# Altium PCB DQLA-F.PcbDoc
Units mil, origin at the board's own origin, x right, y up, seen from the top; angles counter-clockwise.
Board outline 4600.02 x 2750 mil, 4 copper layers (Top Layer, Plane 1, Signal 1, Bottom Layer), stack 62 mil thick; 55 components, 113 nets, 307 pads, 172 vias.
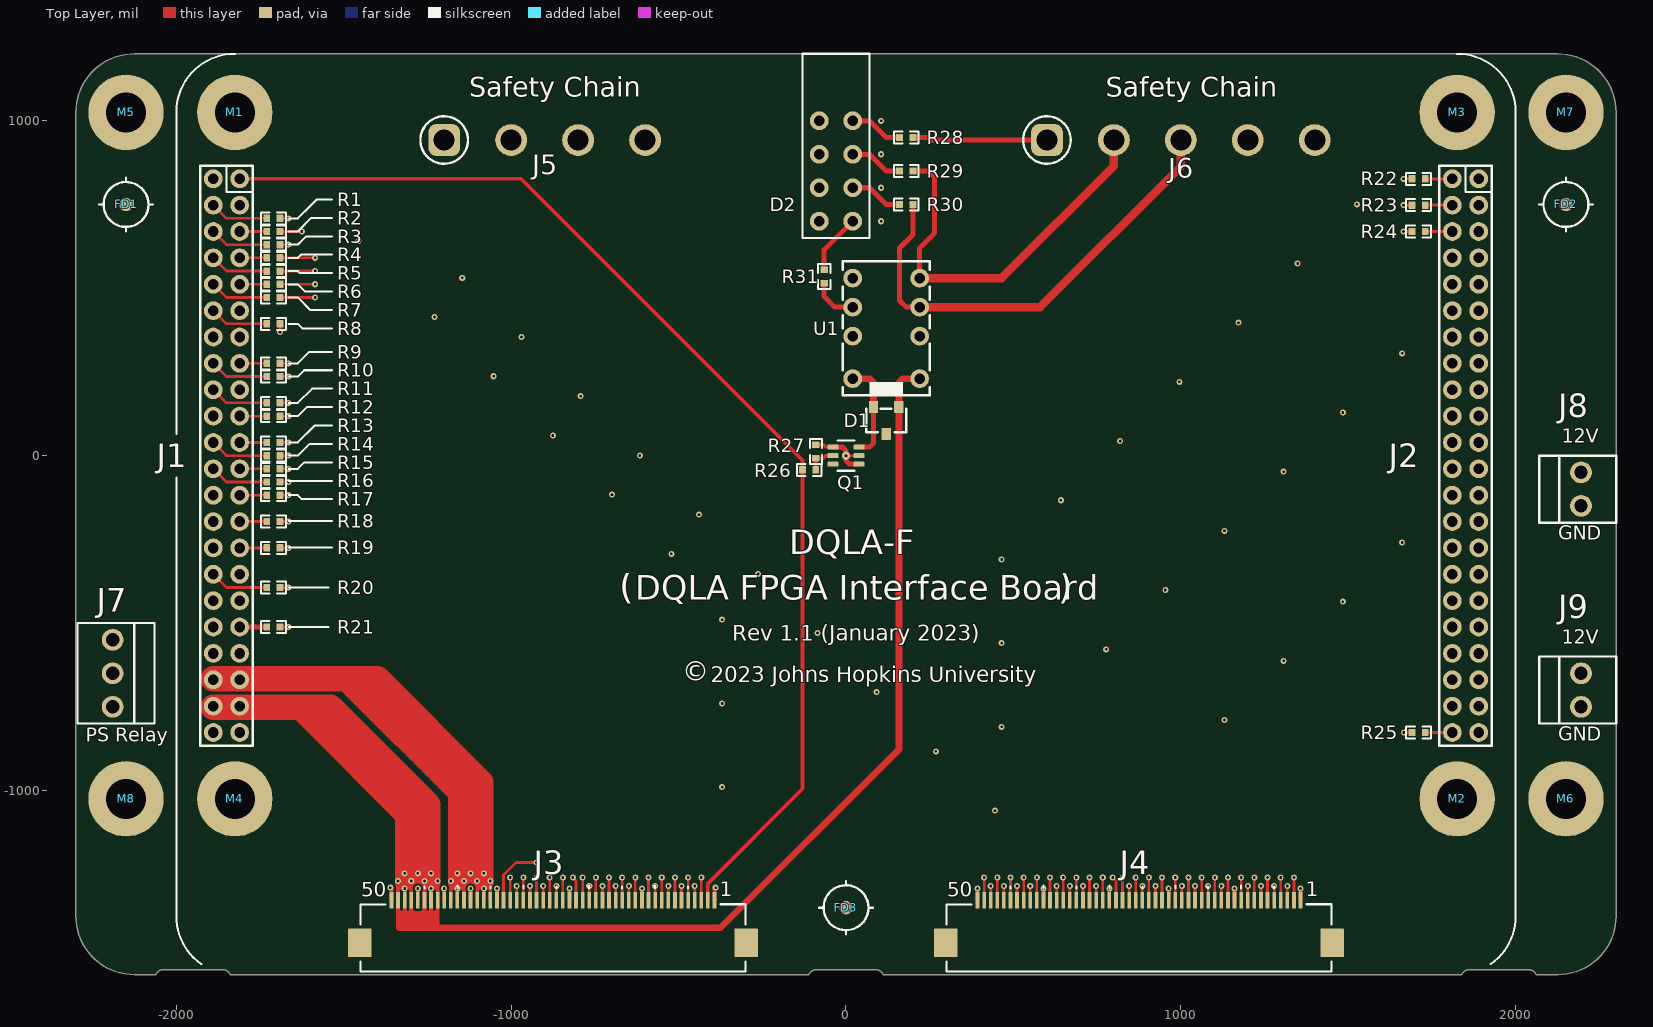
[diagram p0: Top Layer view]
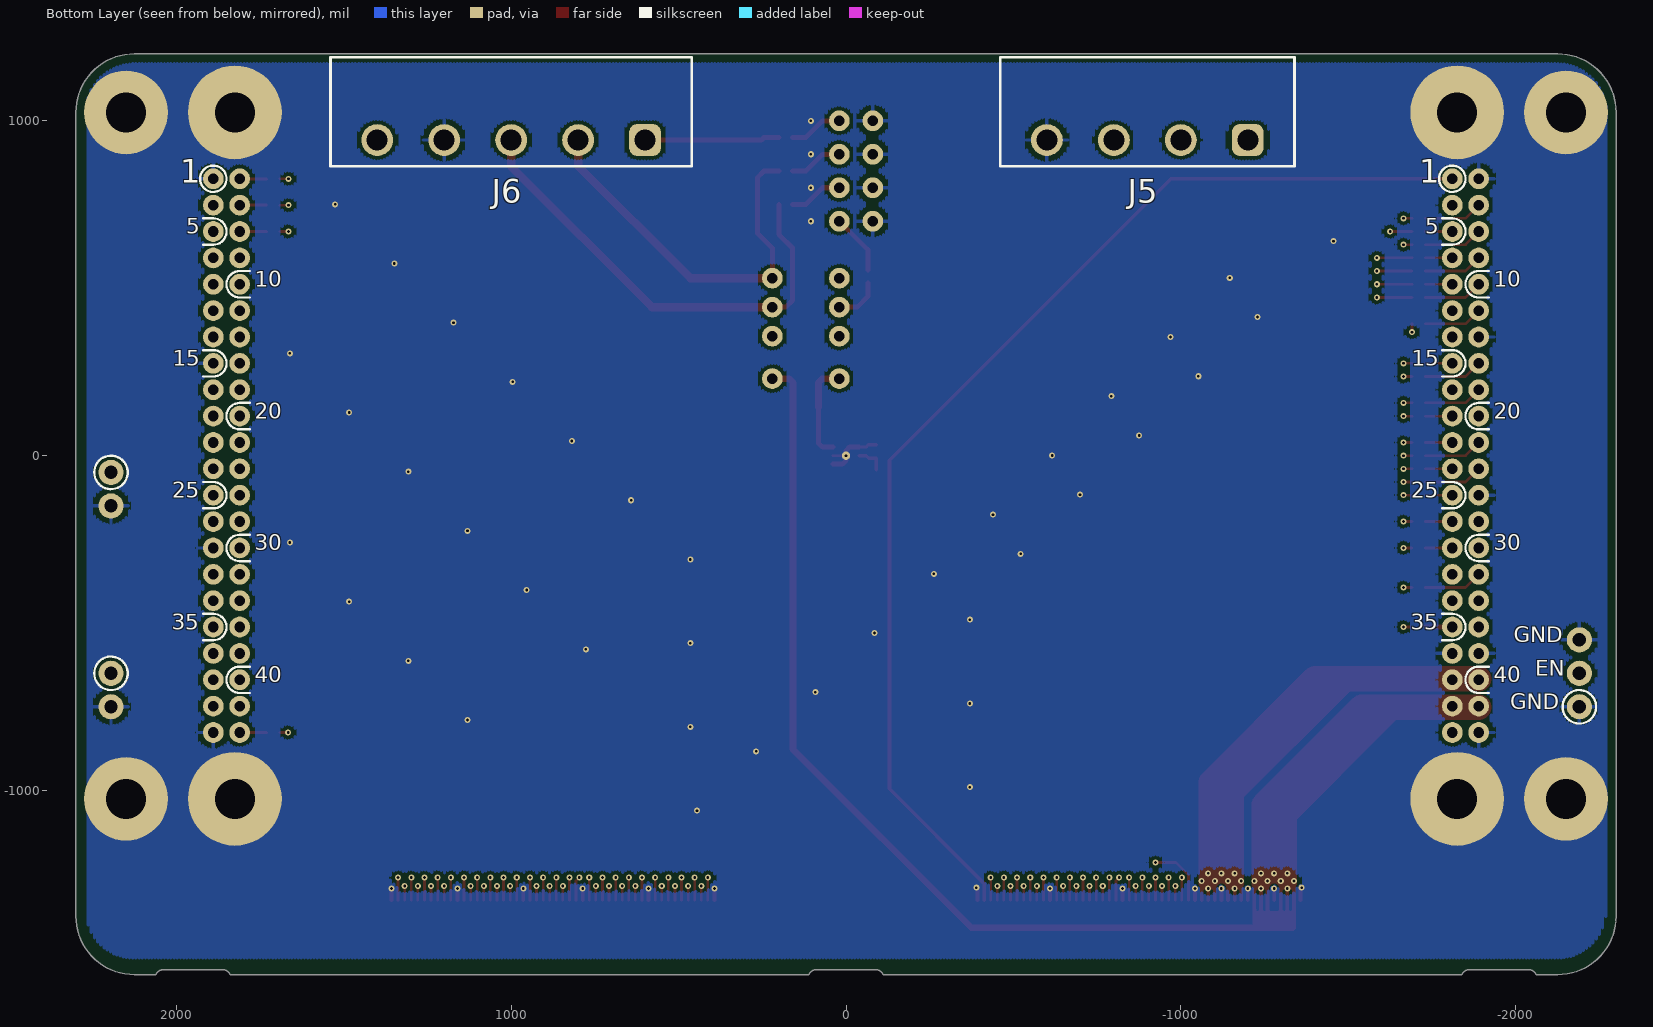
[diagram p1: Bottom Layer view, seen from below]
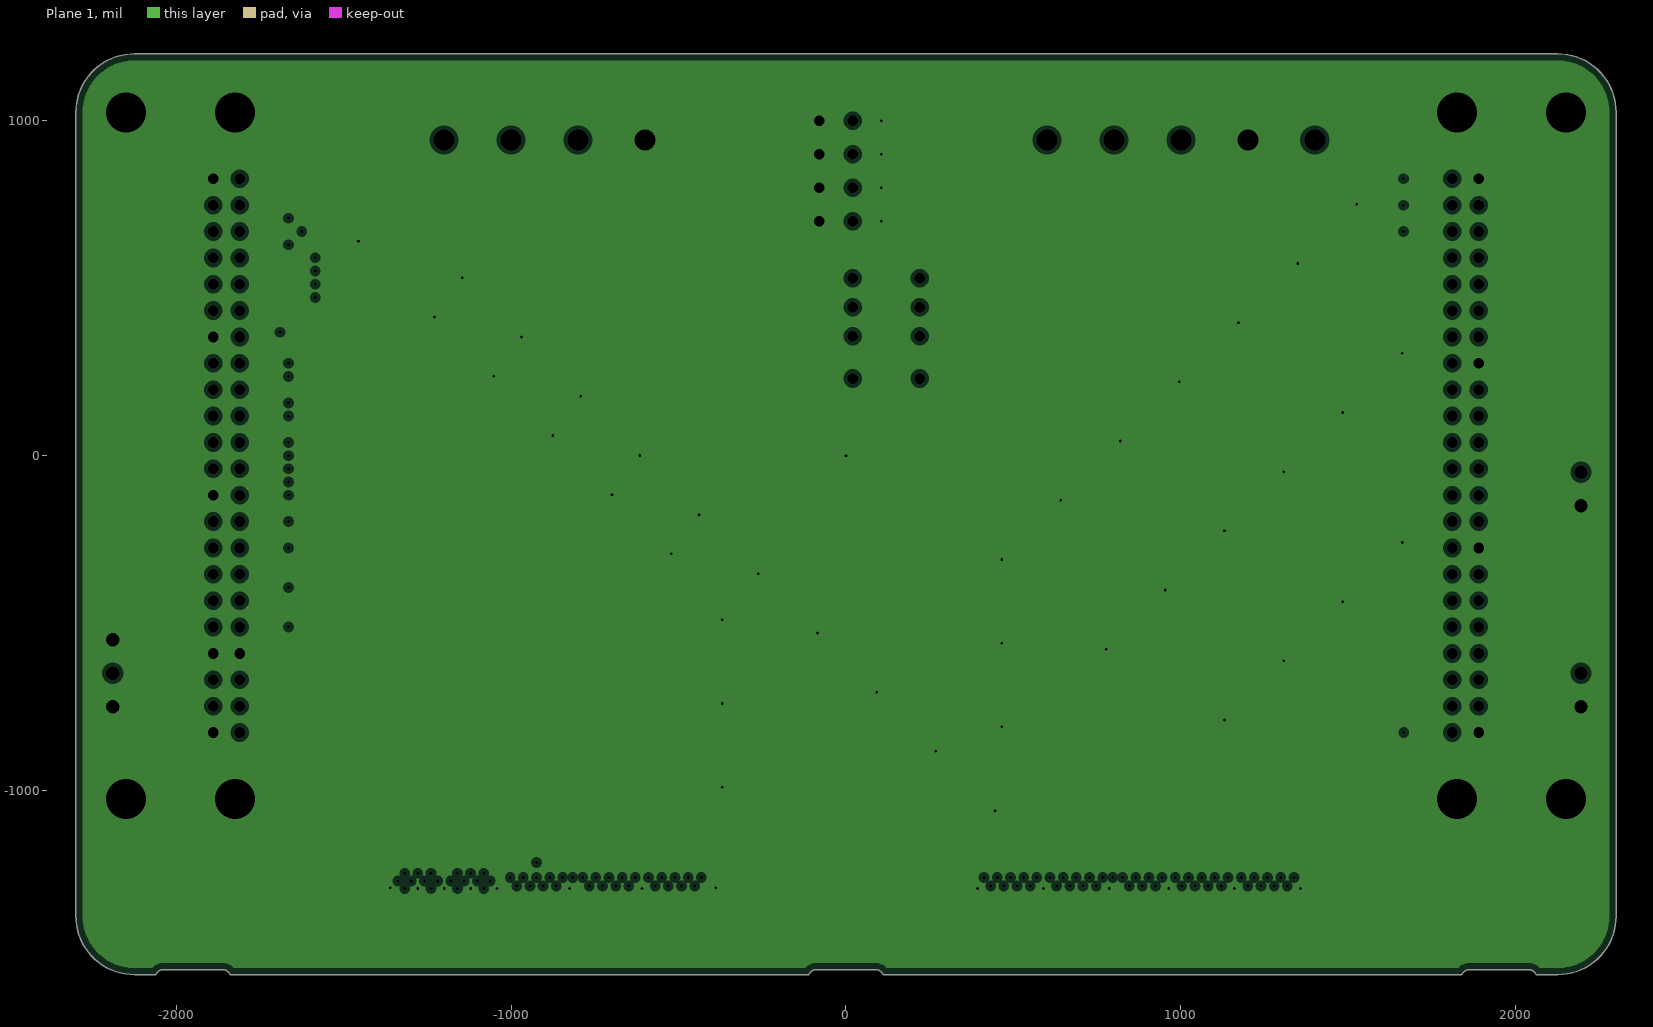
[diagram p2: Plane 1, clearances drawn from the general rule]
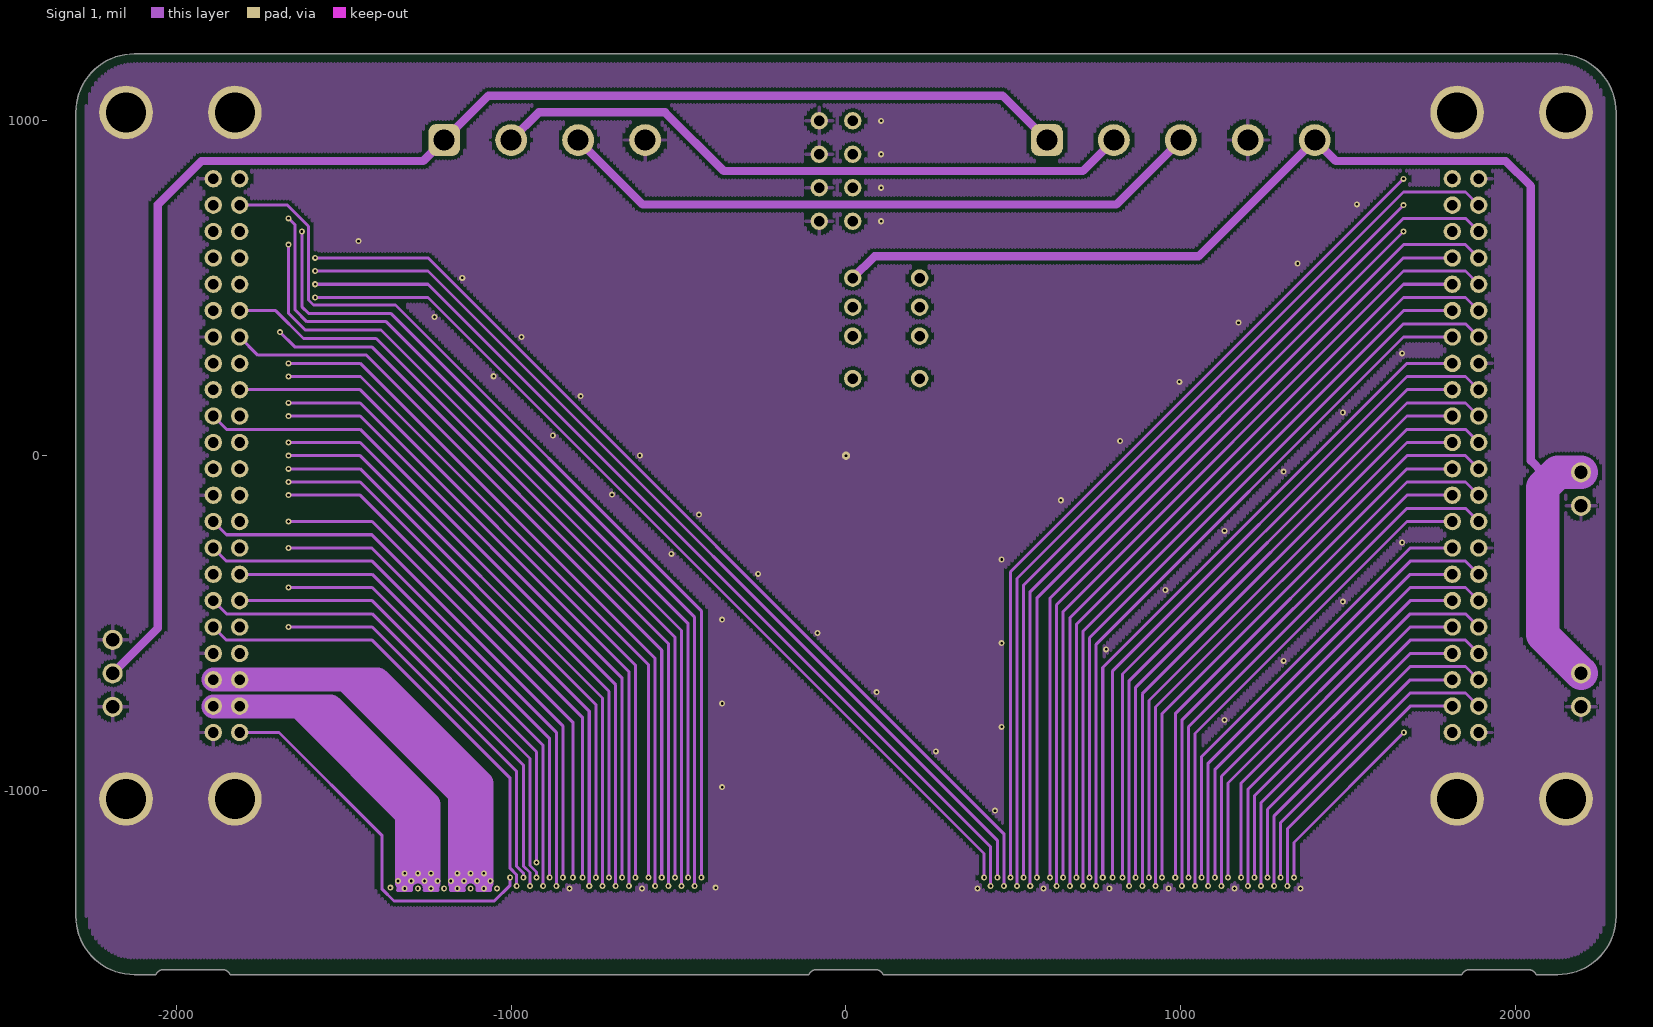
[diagram p3: Signal 1]
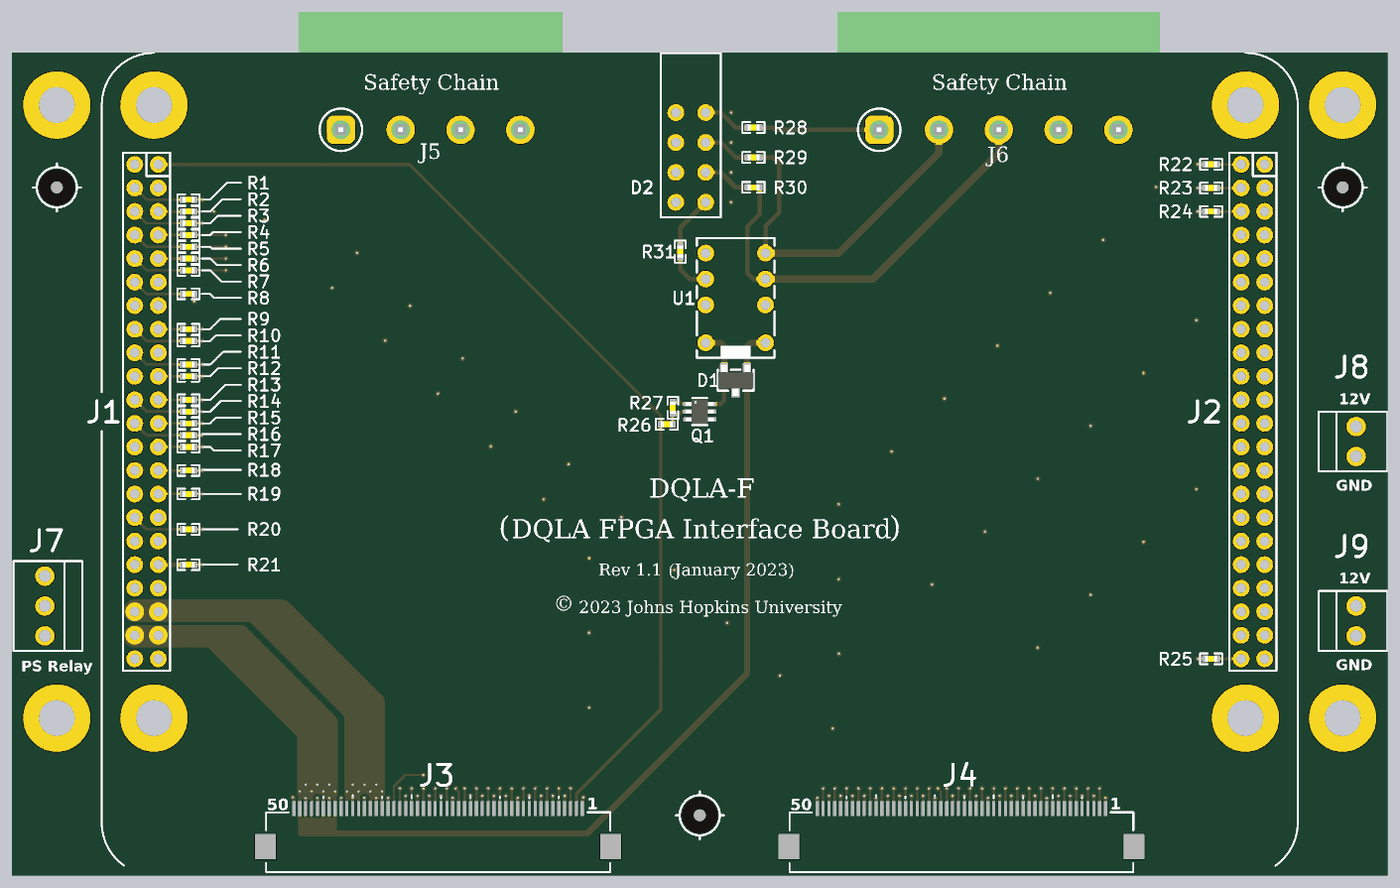
[diagram p4: 3D render of the assembled board from above, using the file's embedded part models]

## Layer stack, top to bottom
Top Solder: solder mask 0.4, Solder Resist, Dk 3.5
Top Layer: signal copper 1.9
Prepreg1: prepreg 8.2, PP-022, Dk 4.5
Plane 1: plane copper 1.4, net GND
Core1: core 39, Core-042, Dk 4.6
Signal 1: signal copper 1.4
Prepreg2: prepreg 8.2, PP-022, Dk 4.5
Bottom Layer: signal copper 1.9
Bottom Solder: solder mask 0.4, Solder Resist, Dk 3.5

## Board outline
-2125,-1550 -2060.91,-1550 cw(c-2038,-1560) -2038,-1535 -1862,-1535 cw(c-1862,-1560) -1839.09,-1550 -110.91,-1550 cw(c-88,-1560) -88,-1535 88,-1535 cw(c88,-1560) 110.92,-1550 1839.08,-1550 cw(c1862,-1560) 1862,-1535 2038,-1535 cw(c2038,-1560) 2060.91,-1550 2125,-1550 ccw(c2125,-1375) 2300,-1375 2300.02,-1375 2300,1025 ccw(c2125,1025) 2125,1200 -2125,1200 ccw(c-2125,1025) -2300,1025 -2300,-1375 ccw(c-2125,-1375)

## Design rules (kind name [scope] priority, off if disabled: settings)
Clearance ClearancePoly [InPoly] p1: gap=10 ignorepadtopadclearanceinfootprint=FALSE
Clearance [All] p2: gap=6 ignorepadtopadclearanceinfootprint=FALSE
ComponentClearance [All] p1 off: gap=10 collisioncheckmode=3 verticalgap=10 showdistances=FALSE
HoleSize [All] p1: absolutevalues=TRUE maxlimit=250 minlimit=8 maxpercent=80.000 minpercent=20.000
MinimumSolderMaskSliver [All] p1: minsoldermaskwidth=6
PlaneClearance [All] p1: clearance=12
PlaneConnect PlaneConnectRelief [(AsMils(Hole)>20) And (AsMils(Hole)<80)] p1: planeconnectstyle=Relief reliefexpansion=20 reliefentries=4 reliefconductorwidth=10 reliefairgap=10
PlaneConnect [All] p2: planeconnectstyle=Direct reliefexpansion=20 reliefentries=4 reliefconductorwidth=10 reliefairgap=10
PolygonConnect [(AsMils(Hole)>20) And (AsMils(Hole)<80)] p1: connectstyle=Relief reliefconductorwidth=10 reliefentries=4 polygonreliefangle="90 Angle" airgapwidth=15
PolygonConnect PolygonConnectDirect [All] p2: connectstyle=Direct reliefconductorwidth=10 reliefentries=4 polygonreliefangle="90 Angle" airgapwidth=10
RoutingVias [All] p1: holewidth=8 width=18 viastyle="Through Hole" minholewidth=8 minwidth=18 maxholewidth=8 maxwidth=18
SilkToSilkClearance [All] p1: silktosilkclearance=2
SilkToSolderMaskClearance [IsPad] p1: minsilkscreentomaskgap=3 clearancetoexposedcopper=TRUE
SolderMaskExpansion [All] p1: expansion=3 istentingtop=FALSE
Width [All] p1: maxlimit=100 minlimit=6 preferedwidth=9 toplayer_prefwidth=8 midlayer1_minwidth=9 bottomlayer_prefwidth=8 minimp=50.000000 maximp=50.000000 favimp=50.000000
23 further rules are at their usual default settings.

## Components (designator, comment, footprint, x,y, rotation, side; value= is the part's Value field where it differs from the comment)
D1 "AZ23C6V8" SOT-23 120,105 r180 top
D2 "WP914CK/4GDT" LED-3MM-QUAD -30,1000 r0 top
FD1 "FD" FD -2150,750 r0 top
FD2 "FD" FD 2150,750 r0 top
FD3 "FD" FD 0,-1350 r0 top
J1 "HEADER 22x2-1" HDR-22x2-2MM -1850,0 r270 top locked
J2 "HEADER 22x2-1" HDR-22x2-2MM 1850,0 r270 top locked
J3 "FPC 50" CONN-XF3M1-5015-1B-REV -875,-1500 r0 top
J4 "FPC 50" CONN-XF3M1-5015-1B-REV 875,-1500 r0 top
J5 "691313510004" 691313510004 -900,1100 r0 bottom (schematic designator J6)
J6 "691313510005" 691313510005 1000,1100 r0 bottom (schematic designator J7)
J7 "HEADER 3" HDR-3x1-100 -2190,-650 r90 top (schematic designator J8)
J8 "HEADER 2" HDR-2x1-100 2195,-100 r270 top (schematic designator J9)
J9 "HEADER 2" HDR-2x1-100 2195,-700 r270 top (schematic designator J5)
M1 "MHOLE" MHOLE4#1 -1825,1025 r0 top
M2 "MHOLE" MHOLE4#1 1825,-1025 r0 top
M3 "MHOLE" MHOLE4#1 1825,1025 r0 top
M4 "MHOLE" MHOLE4#1 -1825,-1025 r0 top
M5 "MHOLE" MHOLE4#2 -2150,1025 r0 top
M6 "MHOLE" MHOLE4#2 2150,-1025 r0 top
M7 "MHOLE" MHOLE4#2 2150,1025 r0 top
M8 "MHOLE" MHOLE4#2 -2150,-1025 r0 top
Q1 "SQ1912" SC70-6-NP 0,0 r270 top
R1 "49.9" R0402 -1710,708.66 r0 top
R2 "49.9" R0402 -1710,669.29 r0 top
R3 "49.9" R0402 -1710,629.92 r0 top
R4 "49.9" R0402 -1710,590.55 r0 top
R5 "49.9" R0402 -1710,551.18 r0 top
R6 "49.9" R0402 -1710,511.81 r0 top
R7 "49.9" R0402 -1710,472.44 r0 top
R8 "49.9" R0402 -1710,393.7 r0 top
R9 "49.9" R0402 -1710,275.59 r0 top
R10 "49.9" R0402 -1710,236.22 r0 top
R11 "49.9" R0402 -1710,157.48 r0 top
R12 "49.9" R0402 -1710,118.11 r0 top
R13 "49.9" R0402 -1710,39.37 r0 top
R14 "49.9" R0402 -1710,0 r0 top
R15 "49.9" R0402 -1710,-39.37 r0 top
R16 "49.9" R0402 -1710,-78.74 r0 top
R17 "49.9" R0402 -1710,-118.11 r0 top
R18 "49.9" R0402 -1710,-196.85 r0 top
R19 "49.9" R0402 -1710,-275.59 r0 top
R20 "49.9" R0402 -1710,-393.7 r0 top
R21 "49.9" R0402 -1710,-511.81 r0 top
R22 "49.9" R0402 1710,826.77 r0 top
R23 "49.9" R0402 1710,748.03 r0 top
R24 "49.9" R0402 1710,669.29 r0 top
R25 "49.9" R0402 1710,-826.77 r0 top
R26 "49.9" R0402 -110,-42.5 r0 top
R27 "1.00K" R0402 -90,12.5 r90 top
R28 "4.99K" R0402 180,950 r180 top
R29 "4.99K" R0402 180,850 r180 top
R30 "4.99K" R0402 180,750 r180 top
R31 "4.99K" R0402 -65,535 r90 top
U1 "RELAY DPDT" RELAY-IM03TS 120,380 r90 top

## Footprints (in the part's own frame and the unit in brackets; to place one, negate y for a bottom-side part, rotate by r counter-clockwise, add the part's x,y. Pads: shape width x height; smd on the part's side, far side on the other; paste and mask are expansions set on the pad)
691313510004 [mil] "5,08mm - PCB Headers - Horizontal - Closed ends - 04p"
  rrect50% 95x95 hole 63: 1(-300,157.48)
  round 95 hole 63: 2(-100,157.48) 3(100,157.48) 4(300,157.48)
  silkscreen extent -439,-90 439,236, body extent -439,-236 439,236, height 337
691313510005 [mil] "5,08mm - PCB Headers - Horizontal - Closed ends - 05p"
  rrect50% 95x95 hole 63: 1(-400,157.48)
  round 95 hole 63: 2(-200,157.48) 3(0,157.48) 4(200,157.48) 5(400,157.48)
  silkscreen extent -539,-90 539,236, body extent -539,-236 539,236, height 337
CONN-XF3M1-5015-1B-REV [mil] "Omron: CONN-XF3M-5015-1B"
  rrect15% 11x50 smd mask+0.5: 1(482.28,172.5) 2(462.6,172.5) 3(442.91,172.5) 4(423.23,172.5) 5(403.54,172.5) 6(383.86,172.5) 7(364.17,172.5) 8(344.49,172.5) 9(324.8,172.5) 10(305.12,172.5) 11(285.43,172.5) 12(265.75,172.5) 13(246.06,172.5) 14(226.38,172.5) 15(206.69,172.5) 16(187.01,172.5) 17(167.32,172.5) 18(147.64,172.5) 19(127.95,172.5) 20(108.27,172.5) 21(88.58,172.5) 22(68.9,172.5) 23(49.21,172.5) 24(29.53,172.5) 25(9.84,172.5) 26(-9.84,172.5) 27(-29.53,172.5) 28(-49.21,172.5) 29(-68.9,172.5) 30(-88.58,172.5) 31(-108.27,172.5) 32(-127.95,172.5) 33(-147.64,172.5) 34(-167.32,172.5) 35(-187.01,172.5) 36(-206.69,172.5) 37(-226.38,172.5) 38(-246.06,172.5) 39(-265.75,172.5) 40(-285.43,172.5) 41(-305.12,172.5) 42(-324.8,172.5) 43(-344.49,172.5) 44(-364.17,172.5) 45(-383.86,172.5) 46(-403.54,172.5) 47(-423.23,172.5) 48(-442.91,172.5) 49(-462.6,172.5) 50(-482.28,172.5)
  rrect5% 70x85 smd: 51(-576.86,45) 52(576.86,45)
  silkscreen extent -575,-40 575,217
FD [mil]
  round 40 smd paste+0: 0(0,0)
  silkscreen extent -80,-80 80,80
HDR-2x1-100 [mil] "AMP 0.100"
  round 65 / inner round 60 / far side round 75 hole 40: 1(-50,0) 2(50,0)
  silkscreen extent -100,-125 100,105
HDR-3x1-100 [mil] "AMP 0.100"
  round 65 / inner round 60 / far side round 75 hole 40: 1(-100,0) 2(0,0) 3(100,0)
  silkscreen extent -150,-125 150,105
HDR-22x2-2MM [mil]
  round 56 / inner round 52 / far side round 62 hole 32: 1(-826.77,39.37) 2(-826.77,-39.37) 3(-748.03,39.37) 4(-748.03,-39.37) 5(-669.29,39.37) 6(-669.29,-39.37) 7(-590.55,39.37) 8(-590.55,-39.37) 9(-511.81,39.37) 10(-511.81,-39.37) 11(-433.07,39.37) 12(-433.07,-39.37) 13(-354.33,39.37) 14(-354.33,-39.37) 15(-275.59,39.37) 16(-275.59,-39.37) 17(-196.85,39.37) 18(-196.85,-39.37) 19(-118.11,39.37) 20(-118.11,-39.37) 21(-39.37,39.37) 22(-39.37,-39.37) 23(39.37,39.37) 24(39.37,-39.37) 25(118.11,39.37) 26(118.11,-39.37) 27(196.85,39.37) 28(196.85,-39.37) 29(275.59,39.37) 30(275.59,-39.37) 31(354.33,39.37) 32(354.33,-39.37) 33(433.07,39.37) 34(433.07,-39.37) 35(511.81,39.37) 36(511.81,-39.37) 37(590.55,39.37) 38(590.55,-39.37) 39(669.29,39.37) 40(669.29,-39.37) 41(748.03,39.37) 42(748.03,-39.37) 43(826.77,39.37) 44(826.77,-39.37)
  silkscreen extent -866,-79 866,79
LED-3MM-QUAD [mil]
  round 56 / inner round 52 / far side round 62 hole 32 mask+2: 1(-50,0) 2(50,0) 3(-50,-100) 4(50,-100) 5(-50,-200) 6(50,-200) 7(-50,-300) 8(50,-300)
  silkscreen extent -100,-350 100,200
MHOLE4#1 [mil]
  round 225 / inner round 160 / far side round 280 hole 120: 1(0,0)
MHOLE4#2 [mil]
  round 225 / inner round 160 / far side round 250 hole 120: 1(0,0)
R0402 [mil]
  rrect15% 20x22 smd mask+2: 1(-20,0) 2(20,0)
  silkscreen extent -37,-18 37,18, body extent -20,-10 20,10, height 20
RELAY-IM03TS [mil]
  round 56 / inner round 52 / far side round 62 hole 32: 1(-150,-100) 2(-23.2,-100) 3(63.4,-100) 4(150,-100) 5(150,100) 6(63.4,100) 7(-23.2,100) 8(-150,100)
  silkscreen extent -200,-130 200,130
SC70-6-NP [mil] "SC70-6, SOT-363"
  rrect20% 15x32 smd mask+2: 1(-25.59,-39) 2(0,-39) 3(25.59,-39) 4(25.59,39) 5(0,39) 6(-25.59,39)
  silkscreen extent -45,-25 45,25, body extent -42,-47 42,47, height 43
SOT-23 [mil]
  rrect15% 28x36 smd mask+2: 1(-38,-40) 2(38,-40) 3(0,40)
  silkscreen extent -60,-35 60,35, body extent -60,-52 60,52, height 44

## Part data
D1: library part ZENER-DUAL-CC, Voltage=6.8V
D2: library part LED-QUAD
J5: "WR-TBL Series 313 Close Horizontal PCB Header, THT, pitch 5.08mm, 4p", Manufacturer="Wurth Elektronik", Operating Temperature Max=105°C, Operating Temperature Min=-40°C, Rated Current=20A, Working Voltage=300V, Application=Pluggable, Category="Terminal Blocks", ComponentLink1Description="Website Link", ComponentLink1URL=https://www.we-online.com/redexpert/article/691313510004?ad, ComponentLink2Description="Datasheet Link", ComponentLink2URL=https://www.we-online.com/redexpert/spec/691313510004?ad, Manufacturer Part Number=691313510004, Match Code=WR-TBL, Modularity=No, Mount="Through Hole", Number of Pins=4, Number of Rows=1, Orientation=Horizontal, Packaging=Box, Pitch=5.08mm
J6: "WR-TBL Series 313 Close Horizontal PCB Header, THT, pitch 5.08mm, 5p", Manufacturer="Wurth Elektronik", Operating Temperature Max=105°C, Operating Temperature Min=-40°C, Rated Current=20A, Working Voltage=300V, Application=Pluggable, Category="Terminal Blocks", ComponentLink1Description="Website Link", ComponentLink1URL=https://www.we-online.com/redexpert/article/691313510005?ad, ComponentLink2Description="Datasheet Link", ComponentLink2URL=https://www.we-online.com/redexpert/spec/691313510005?ad, Manufacturer Part Number=691313510005, Match Code=WR-TBL, Modularity=No, Mount="Through Hole", Number of Pins=5, Number of Rows=1, Orientation=Horizontal, Packaging=Box, Pitch=5.08mm
M1 M2 M3 M4 M5 M6 M7 M8: "Mounting Hole"
Q1: library part MOSFET-N-DUAL6
R1 R2 R3 R4 R5 R6 R7 R8 R9 R10 R11 R12 R13 R14 R15 R16 R17 R18 R19 R20 R21 R22 R23 R24 R25 R26 R28 R29 R30 R31: library part R
R27: library part R-GND

## Free pads (board coordinates)
  round 25 hole 8 mask+3: 2(0,0)

## Via types
v1: diameter 18, hole 8, Top Layer to Bottom Layer, tented both sides, 172 vias

## Nets (pads, with @x,y where several pads share a name; then routed paths per layer and width w, separated by ;. In a path a pad name is that pad's centre, name@x,y a point inside that pad or via, vN(x,y) a via of type N, cw(c..) or ccw(c..) an arc to the next point about the centre after c; other vN are vias at no path point)
3.3V-OUT: J1.39 J1.40 J3.35 J3.36 J3.37 J3.39 J3.40 J3.41 | length 3670
  Top Layer w11: -1183.62,-1244 -1183.62,-1279.92 cw(c-1199.8,-1292.5) -1180.12,-1298.22 J3.41 ; -1180.12,-1300 cw(c-1170.28,-1300) v1@-1160.43,-1299.91 ; J3.40 v1@-1160.43,-1299.91 ; v1(-1160.43,-1292.5) v1@-1160.43,-1299.91 ; J3.39 -1140.75,-1299.92 ; -1140.75,-1300 ccw(c-1150.59,-1300) -1140.75,-1299.92 ; -1140.75,-1286.78 -1140.75,-1244 ; J3.37 -1101.38,-1298.22 ccw(c-1121.06,-1292.5) -1140.75,-1298.22 -1140.75,-1299.92 ; -1101.38,-1300 cw(c-1091.54,-1300) v1@-1081.69,-1299.91 ; -1101.38,-1286.78 v1(-1101.38,-1270) -1101.38,-1244 ; J3.36 v1@-1081.69,-1299.91 ; v1(-1081.69,-1292.5) v1@-1081.69,-1299.91 ; J3.35 -1062.01,-1299.88 ; -1062.01,-1300 ccw(c-1071.85,-1300) -1062.01,-1299.88 ; -1058.51,-1244 -1058.51,-1279.92 ccw(c-1042.32,-1292.5) -1062.01,-1298.22 -1062.01,-1299.88 ; v1@-1160.43,-1299.91 ccw(c-1150.59,-1300) -1160.43,-1300 ccw(c-1170.28,-1300) v1@-1160.43,-1299.91 ; v1@-1160.43,-1299.91 cw(c-1150.59,-1300) -1140.75,-1299.92 ; v1@-1081.69,-1299.91 cw(c-1071.85,-1300) -1062.01,-1299.88 ; v1@-1081.69,-1299.91 ccw(c-1071.85,-1300) -1081.69,-1300 ccw(c-1091.54,-1300) v1@-1081.69,-1299.91
  Top Layer w76: J1.40@-1889.37,-666.29 -1399.37,-666.29 -1091.14,-974.52 ; -1489.37,-666.29 -1135.82,-1019.84
  Signal 1 w11: -1183.62,-1258.9 -1183.62,-1279.92 cw(c-1199.8,-1292.5) -1180.12,-1298.22 -1140.75,-1298.22 cw(c-1121.06,-1292.5) -1101.38,-1298.22 -1062.01,-1298.22 cw(c-1042.32,-1292.5) -1058.51,-1279.92 -1058.51,-1258.9
  Signal 1 w72: J1.40@-1889.37,-668.29 -1399.37,-668.29
  Signal 1 w76: -1489.37,-670.29 -1135.82,-1023.84 ; -1399.37,-670.29 -1091.28,-978.38
  other v1: -1180.12,-1270 -1140.75,-1270 -1062.01,-1270 -1160.43,-1247.5 -1121.06,-1247.5 -1081.69,-1247.5
5V-OUT: D1.1 J1.41 J1.42 J3.43 J3.44 J3.45 J3.47 J3.48 J3.49 U1.1 | length 6758.1
  Top Layer w11: -1341.1,-1244 -1341.1,-1279.92 -1335.44,-1285.57 ; -1337.6,-1410 J3.49 -1337.6,-1282.5 ; -1337.6,-1355 ccw(c-1327.76,-1355) -1317.91,-1355.09 ; -1337.6,-1300 cw(c-1327.76,-1300) v1@-1317.91,-1299.91 ; v1(-1317.91,-1292.5) v1@-1317.91,-1299.91 ; -1298.23,-1410 J3.47 -1298.23,-1299.92 ; -1298.23,-1355.08 cw(c-1308.07,-1355) -1317.91,-1355.09 ; -1298.23,-1355 ccw(c-1288.39,-1355) -1288.39,-1364.84 ; -1298.23,-1300 ccw(c-1308.07,-1300) -1298.23,-1299.92 ; -1298.23,-1244 -1298.23,-1286.77 ; -1268.7,-1364.84 ccw(c-1268.7,-1355) -1258.86,-1355 ccw(c-1249.02,-1355) -1239.17,-1355.09 ; -1258.86,-1410 J3.45 -1258.86,-1298.22 ccw(c-1278.54,-1292.5) -1258.86,-1286.78 ; -1258.86,-1300 cw(c-1249.02,-1300) v1@-1239.17,-1299.91 ; -1258.86,-1244 v1(-1258.86,-1270) -1258.86,-1286.78 ; v1(-1239.17,-1292.5) v1@-1239.17,-1299.91 ; -1219.49,-1410 J3.43 -1219.49,-1299.88 ; -1219.49,-1355.08 cw(c-1229.33,-1355) -1239.17,-1355.09 ; -1219.49,-1300 ccw(c-1229.33,-1300) -1219.49,-1299.88 ; -1215.99,-1244 -1215.99,-1279.92 ccw(c-1199.8,-1292.5) -1219.49,-1298.22 -1219.49,-1299.88 ; -1317.91,-1355.09 J3.48 v1@-1317.91,-1299.91 ; v1@-1317.91,-1299.91 cw(c-1308.07,-1300) -1298.23,-1299.92 ; v1@-1317.91,-1299.91 ccw(c-1308.07,-1300) -1317.91,-1300 ccw(c-1327.76,-1300) v1@-1317.91,-1299.91 ; -1298.23,-1299.92 -1298.23,-1298.22 cw(c-1278.54,-1292.5) -1298.23,-1286.77 ; -1298.23,-1286.77 cw(c-1278.54,-1292.5) -1258.86,-1286.78 ; -1239.17,-1355.09 J3.44 v1@-1239.17,-1299.91 ; v1@-1239.17,-1299.91 cw(c-1229.33,-1300) -1219.49,-1299.88 ; v1@-1239.17,-1299.91 ccw(c-1229.33,-1300) -1239.17,-1300 ccw(c-1249.02,-1300) v1@-1239.17,-1299.91
  Top Layer w20: -1333.1,-1410 -375,-1410 158,-877 D1.1 158,218 170,230 U1.1
  Top Layer w76: J1.42@-1889.37,-751.03 -1629.37,-751.03 ; -1275.82,-1104.58 -1629.37,-751.03 ; -1248.61,-1041.79 -1539.37,-751.03 -1629.37,-751.03
  Signal 1 w11: -1341.1,-1258.9 -1341.1,-1279.92 cw(c-1357.28,-1292.5) -1337.6,-1298.22 -1298.23,-1298.22 cw(c-1278.54,-1292.5) -1258.86,-1298.22 -1219.49,-1298.22 cw(c-1199.8,-1292.5) -1215.99,-1279.92 -1215.99,-1258.9
  Signal 1 w72: J1.42@-1889.37,-749.03 -1629.37,-749.03
  Signal 1 w76: -1275.82,-1104.58 -1629.37,-751.03 -1539.37,-751.03 -1248.75,-1041.65
  other v1: -1337.6,-1270 -1298.23,-1270 -1219.49,-1270 -1317.91,-1247.5 -1278.54,-1247.5 -1239.17,-1247.5
12V: J6.5 J8.1 J9.1 U1.5 | length 3903.6
  Signal 1 w25: U1.5 85,595 1052.48,595 J6.5 1462.52,880 1970,880 2045,805 2045,-15 2080,-50 2080,-95
  Signal 1 w100: J9.1 2080,-535 2080,-95 2125,-50 J8.1
/Q1-DAC: J1.28 J3.24 | length 1817.3
  Top Layer w8: J3.24 v1(-845.47,-1260)
  Signal 1 w9: J1.28 -1850,-236.22 -1415.94,-236.22 -845.47,-806.69 v1(-845.47,-1260)
/Q1-EEPROM: J3.33 R20.2 | length 1488.5
  Top Layer w8: R20.2 v1(-1665,-393.7) ; J3.33 -1022.64,-1252.64 -985,-1215 v1(-924.21,-1215)
  Signal 1 w9: v1(-1665,-393.7) -1415,-393.7 -924.21,-884.49 v1(-924.21,-1215)
/Q1-EXP-CS: J3.8 R8.2 | length 2336.2
  Top Layer w8: v1(-1690,368.7) R8.2 ; J3.8 v1(-530.51,-1285)
  Signal 1 w9: v1(-1690,368.7) -1646.3,325 -1416.3,325 -530.51,-560.79 v1(-530.51,-1285)
/Q1-IOEXP: J3.30 R21.2 | length 1277.7
  Top Layer w8: R21.2 v1(-1665,-511.81) ; J3.30 v1(-963.58,-1260)
  Signal 1 w9: v1(-1665,-511.81) -1415,-511.81 -983.27,-943.54 -983.27,-1226.73 -963.58,-1246.42 v1(-963.58,-1260)
/Q2-DAC: J1.11 J3.7 | length 2489.2
  Top Layer w8: J3.7 v1(-510.83,-1260)
  Signal 1 w9: J1.11 -1703.07,433.07 -1620,350 -1402.87,350 -510.83,-542.05 v1(-510.83,-1260)
/Q2-EEPROM: J3.6 R3.2 | length 2601.3
  Top Layer w8: R3.2 v1(-1665,629.92) ; J3.6 v1(-491.14,-1285)
  Signal 1 w9: v1(-1665,629.92) -1665,425 -1615,375 -1388.5,375 -491.14,-522.36 v1(-491.14,-1285)
/Q2-EXP-CS: J3.10 R9.2 | length 2207.1
  Top Layer w8: R9.2 v1(-1665,275.59) ; J3.10 v1(-569.88,-1285)
  Signal 1 w9: v1(-1665,275.59) -1450.94,275.59 -569.88,-605.47 v1(-569.88,-1285)
/Q2-IOEXP: J3.14 R11.2 | length 2056.4
  Top Layer w8: R11.2 v1(-1665,157.48) ; J3.14 v1(-648.62,-1285)
  Signal 1 w9: v1(-1665,157.48) -1450.94,157.48 -648.62,-644.84 v1(-648.62,-1285)
CONV-CUR: J3.22 R18.2 | length 1657.9
  Top Layer w8: R18.2 v1(-1665,-196.85) ; v1(-815.94,-1260) -806.1,-1269.84 J3.22
  Signal 1 w9: v1(-1665,-196.85) -1415,-196.85 -815.94,-795.91 v1(-815.94,-1260)
CONV-POT: J3.20 R16.2 | length 1771.2
  Top Layer w8: R16.2 v1(-1665,-78.74) ; J3.20 v1(-766.73,-1285)
  Signal 1 w9: v1(-1665,-78.74) -1450.94,-78.74 -766.73,-762.95 v1(-766.73,-1285)
EN: J5.1 J6.1 J7.2 R28.1 | length 4703.5
  Top Layer w15: R28.1 245,950 252.48,942.52 J6.1
  Signal 1 w25: J7.2 -2055,-515 -2055,750 -1925,880 -1262.52,880 J5.1 -1067.52,1075 467.52,1075 J6.1
EXP-MISO: J1.17 J3.13 | length 2224.5
  Top Layer w8: J3.13 v1(-628.94,-1260)
  Signal 1 w9: J1.17 -1450.94,196.85 -628.94,-625.16 v1(-628.94,-1260)
GND: D2.1 D2.3 D2.5 D2.7 J1.2 J1.14 J1.26 J1.37 J1.38 J1.44 J2.1 J2.15 J2.29 J2.43 J3.1 J3.12 J3.23 J3.34 J3.38 J3.42 J3.46 J3.50 J4.1 J4.11 J4.21 J4.30 J4.40 J4.50 J5.4 J6.4 J7.1 J7.3 J8.2 J9.2 M1.1 M2.1 M3.1 M4.1 M5.1 M6.1 M7.1 M8.1 pad.2 Q1.1 Q1.4 Q1.5 R27.2 | length 720.6
  Top Layer w8: pad.2 Q1.5
  Top Layer w10: R27.2 -66.91,32.5 -60,25.59 Q1.1
  Top Layer w11: v1@-1363.26,-1292.48 v1@-1357.6,-1298.13 ; J3.50 v1@-1357.28,-1290 ; J3.46 v1(-1278.54,-1292.5) ; J3.42 v1(-1199.8,-1292.5) ; J3.38 v1(-1121.06,-1292.5) ; J3.34 v1(-1042.32,-1292.5) ; J3.23 v1(-825.79,-1292.5) ; J3.12 v1(-609.25,-1292.5) ; J3.1 v1@-392.72,-1290 ; v1@-392.4,-1298.13 v1@-386.74,-1292.48 ; J4.50 v1(392.72,-1292.5) ; J4.40 v1(589.57,-1292.5) ; J4.30 v1(786.42,-1292.5) ; J4.21 v1(963.58,-1292.5) ; J4.11 v1(1160.43,-1292.5) ; J4.1 v1(1357.28,-1292.5)
  Top Layer w15: Q1.1 -10.59,25.59 0,15 pad.2 0,-15 10.59,-25.59 Q1.4
  other v1: -1360.78,-1290 -389.22,-1290 445,-1060 -370,-990 268.22,-883.22 465,-810 1130.33,-789.67 -370,-740 91.45,-706.45 1307.11,-612.89 776.78,-578.22 465,-560 -85.33,-529.67 -370,-490 1483.88,-436.12 953.55,-401.45 -262.11,-352.89 465,-310 -521.78,-293.22 1660.66,-259.34 1130.33,-224.67 -438.88,-176.12 641.78,-133.22 -698.55,-116.45 1307.11,-47.89 -615.66,0.66 818.55,43.55 -875.33,60.33 1483.88,128.88 -792.44,177.44 995.33,220.33 -1052.11,237.11 1660.66,305.66 -969.21,354.21 1172.11,397.11 -1228.88,413.88 -1145.99,530.99 1348.88,573.88 -1455.66,640.66 105,700 1525.66,750.66 105,800 105,900 105,1000
L1A: J5.3 J6.3 R30.1 U1.3 | length 3363.8
  Top Layer w15: R30.1 200,660 160,620 160,463.4 180,443.4 U1.3
  Top Layer w25: U1.3 579.62,443.4 1000,863.78 J6.3
  Signal 1 w25: J5.3 -607.48,750 807.48,750 J6.3
L1B: J5.2 J6.2 R29.1 U1.4 | length 3133.2
  Top Layer w15: R29.1 245,850 265,830 265,665 220,620 U1.4
  Top Layer w25: U1.4 465,530 800,865 J6.2
  Signal 1 w25: J5.2 -917.52,1025 -540,1025 -365,850 707.48,850 J6.2
MISO1: J1.3 J3.3 | length 2873.4
  Top Layer w8: J3.3 v1(-432.09,-1260)
  Signal 1 w9: J1.3 -1668.03,748.03 -1605,685 -1605,464.86 -1593.08,452.94 -1592.94,452.94 -1590,450 -1345.39,450 -432.09,-463.31 v1(-432.09,-1260)
MOSI1: J3.5 R1.2 | length 2694.3
  Top Layer w8: R1.2 v1(-1665,708.66) ; J3.5 v1(-471.46,-1260)
  Signal 1 w9: v1(-1665,708.66) -1645,688.66 -1645,435 -1610,400 -1373.19,400 -471.46,-501.73 v1(-471.46,-1260)
NetD1_2: D1.2 Q1.6 U1.8 | length 295.7
  Top Layer w15: Q1.6 70.59,25.59 82,37 D1.2
  Top Layer w20: U1.8 70,230 82,218 D1.2
NetD2_2: D2.2 R28.2 | length 160.7
  Top Layer w15: D2.2 70,1000 120,950 R28.2
NetD2_4: D2.4 R29.2 | length 160.7
  Top Layer w15: D2.4 70,900 120,850 R29.2
NetD2_6: D2.6 R30.2 | length 160.7
  Top Layer w15: D2.6 70,800 120,750 R30.2
NetD2_8: D2.8 R31.2 | length 180.2
  Top Layer w15: R31.2 -65,615 D2.8
NetJ1_4: J1.4 R1.1 | length 175.7
  Top Layer w8: J1.4 -1850,708.66 R1.1
NetJ1_5: J1.5 R2.1 | length 80.6
  Top Layer w8: J1.5 R2.1
NetJ1_6: J1.6 R3.1 | length 175.7
  Top Layer w8: J1.6 -1850,629.92 R3.1
NetJ1_7: J1.7 R4.1 | length 80.6
  Top Layer w8: J1.7@-1810.63,590.55 R4.1
NetJ1_8: J1.8 R5.1 | length 175.7
  Top Layer w8: J1.8 -1850,551.18 R5.1
NetJ1_9: J1.9 R6.1 | length 80.6
  Top Layer w8: J1.9 R6.1
NetJ1_10: J1.10 R7.1 | length 175.7
  Top Layer w8: J1.10 -1850,472.44 R7.1
NetJ1_12: J1.12 R8.1 | length 175.7
  Top Layer w8: J1.12 -1850,393.7 R8.1
NetJ1_15: J1.15 R9.1 | length 80.6
  Top Layer w8: J1.15 R9.1
NetJ1_16: J1.16 R10.1 | length 175.7
  Top Layer w8: J1.16 -1850,236.22 R10.1
NetJ1_18: J1.18 R11.1 | length 175.7
  Top Layer w8: J1.18 -1850,157.48 R11.1
NetJ1_19: J1.19 R12.1 | length 80.6
  Top Layer w8: J1.19 R12.1
NetJ1_21: J1.21 R13.1 | length 80.6
  Top Layer w8: J1.21 R13.1
NetJ1_22: J1.22 R14.1 | length 175.7
  Top Layer w8: J1.22 -1850,0 R14.1
NetJ1_23: J1.23 R15.1 | length 80.6
  Top Layer w8: J1.23 R15.1
NetJ1_24: J1.24 R16.1 | length 175.7
  Top Layer w8: J1.24 -1850,-78.74 R16.1
NetJ1_25: J1.25 R17.1 | length 80.6
  Top Layer w8: J1.25 R17.1
NetJ1_27: J1.27 R18.1 | length 80.6
  Top Layer w8: J1.27@-1810.63,-196.85 R18.1
NetJ1_29: J1.29 R19.1 | length 80.6
  Top Layer w8: J1.29 R19.1
NetJ1_32: J1.32 R20.1 | length 175.7
  Top Layer w8: J1.32 -1850,-393.7 R20.1
NetJ1_35: J1.35 R21.1 | length 80.6
  Top Layer w15: J1.35 R21.1
NetJ2_2: J2.2 R22.2 | length 80.6
  Top Layer w9: R22.2 J2.2
NetJ2_4: J2.4 R23.2 | length 80.6
  Top Layer w9: R23.2 J2.4
NetJ2_6: J2.6 R24.2 | length 80.6
  Top Layer w9: R24.2 J2.6
NetJ2_44: J2.44 R25.2 | length 80.6
  Top Layer w9: R25.2 J2.44
NetQ1_2: Q1.2 R26.2 R27.1 | length 89.1
  Top Layer w10: R26.2 R27.1 -67.5,-7.5 -60,0 Q1.2
Q1-DIR12: J1.43 J3.32 | length 1219.8
  Top Layer w8: J3.32 v1(-1002.95,-1260)
  Signal 1 w9: J1.43 -1693.23,-826.77 -1385,-1135 -1385,-1295 -1350,-1330 -1050,-1330 -1002.95,-1282.95 v1(-1002.95,-1260)
Q1-DIR34: J1.36 J3.31 | length 1445.8
  Top Layer w8: J3.31 v1(-983.27,-1285)
  Signal 1 w9: J1.36 -1850,-551.18 -1415,-551.18 -1002.95,-963.23 -1002.95,-1232.42 -983.27,-1252.11 v1(-983.27,-1285)
Q1-ENC-A1: J2.25 J4.20 | length 1766
  Top Layer w8: J4.20 v1(983.27,-1260)
  Signal 1 w9: v1(983.27,-1260) 983.27,-770.47 1675,-78.74 1850,-78.74 J2.25
Q1-ENC-A2: J2.27 J4.18 | length 1670.9
  Top Layer w8: J4.18 v1(1022.64,-1260)
  Signal 1 w9: v1(1022.64,-1260) 1022.64,-809.84 1675,-157.48 1850,-157.48 J2.27@1889.37,-196.85
Q1-ENC-A3: J2.30 J4.16 | length 1435.6
  Top Layer w8: J4.16 v1(1062.01,-1260)
  Signal 1 w9: v1(1062.01,-1260) 1062.01,-898.58 1685,-275.59 J2.30
Q1-ENC-A4: J2.32 J4.14 | length 1340.5
  Top Layer w8: J4.14 v1(1101.38,-1260)
  Signal 1 w9: v1(1101.38,-1260) 1101.38,-937.95 1685,-354.33 J2.32
Q1-ENC-B1: J2.34 J4.12 | length 1245.5
  Top Layer w8: J4.12 v1(1140.75,-1260)
  Signal 1 w9: v1(1140.75,-1260) 1140.75,-977.32 1685,-433.07 J2.34
Q1-ENC-B2: J2.36 J4.9 | length 1142.3
  Top Layer w8: J4.9 v1(1199.8,-1285)
  Signal 1 w9: v1(1199.8,-1285) 1199.8,-997.01 1685,-511.81 J2.36
Q1-ENC-B3: J2.38 J4.7 | length 1047.2
  Top Layer w8: J4.7 v1(1239.17,-1285)
  Signal 1 w9: v1(1239.17,-1285) 1239.17,-1036.38 1685,-590.55 J2.38
Q1-ENC-B4: J2.40 J4.5 | length 952.2
  Top Layer w8: J4.5 v1(1278.54,-1285)
  Signal 1 w9: v1(1278.54,-1285) 1278.54,-1075.75 1685,-669.29 J2.40
Q1-EXP-MOSI: J3.15 R12.2 | length 2008.8
  Top Layer w8: R12.2 v1(-1665,118.11) ; J3.15 v1(-668.31,-1260)
  Signal 1 w9: v1(-1665,118.11) -1450.94,118.11 -668.31,-664.53 v1(-668.31,-1260)
Q1-EXP-SCLK: J3.17 R13.2 | length 1913.8
  Top Layer w8: R13.2 v1(-1665,39.37) ; J3.17 v1(-707.68,-1260)
  Signal 1 w9: v1(-1665,39.37) -1450.95,39.37 -707.68,-703.9 v1(-707.68,-1260)
Q1-LIM-P3: J2.17 J4.29 | length 2162.5
  Top Layer w8: v1(796.26,-1260) 806.1,-1269.84 J4.29
  Signal 1 w9: v1(796.26,-1260) 796.26,-642.52 1675,236.22 1850,236.22 J2.17
Q1-LIM-P4: J2.16 J4.31 | length 2114.9
  Top Layer w8: J4.31 v1(766.73,-1260)
  Signal 1 w9: v1(766.73,-1260) 766.73,-632.68 1675,275.59 J2.16
Q1-MISO-C1: J2.5 J4.42 | length 2738.6
  Top Layer w8: J4.42 v1(550.2,-1285)
  Signal 1 w9: v1(550.2,-1285) 550.2,-406.14 1665,708.66 1850,708.66 J2.5
Q1-MISO-C2: J2.3 J4.44 | length 2833.7
  Top Layer w8: J4.44 v1(510.83,-1285)
  Signal 1 w9: v1(510.83,-1285) 510.83,-366.77 1665,787.4 1850,787.4 J2.3
Q1-MISO-C3: J2.8 J4.38 | length 2492.8
  Top Layer w8: J4.38 v1(628.94,-1285)
  Signal 1 w9: v1(628.94,-1285) 628.94,-445.51 1665,590.55 J2.8
Q1-MISO-C4: J2.7 J4.39 | length 2635.4
  Top Layer w8: J4.39 v1(609.25,-1260)
  Signal 1 w9: v1(609.25,-1260) 609.25,-425.83 1665,629.92 1850,629.92 J2.7
Q1-MISO-P1: J1.31 J3.27 | length 1580.2
  Top Layer w8: J3.27 v1(-904.53,-1285)
  Signal 1 w9: J1.31 -1415,-354.33 -904.53,-864.8 v1(-904.53,-1285)
Q1-MISO-P2: J1.30 J3.26 | length 1722.8
  Top Layer w8: J3.26 v1(-884.84,-1260)
  Signal 1 w9: J1.30 -1850,-314.96 -1415,-314.96 -884.84,-845.12 v1(-884.84,-1260)
Q1-MISO-P3: J1.34 J3.29 | length 1540.9
  Top Layer w8: J3.29 v1(-943.9,-1285)
  Signal 1 w9: J1.34 -1850,-472.44 -1415,-472.44 -963.58,-923.86 -963.58,-1225.2 -943.9,-1244.89 v1(-943.9,-1285)
Q1-MISO-P4: J1.33 J3.28 | length 1493.3
  Top Layer w8: J3.28 v1(-924.21,-1260)
  Signal 1 w9: J1.33 -1415,-433.07 -943.9,-904.17 -943.9,-1223.68 -924.21,-1243.36 v1(-924.21,-1260)
Q1-MOSI: J3.25 R19.2 | length 1554.1
  Top Layer w8: R19.2 v1(-1665,-275.59) ; J3.25 v1(-865.16,-1285)
  Signal 1 w9: v1(-1665,-275.59) -1415.94,-275.59 -865.16,-826.38 v1(-865.16,-1285)
Q1-OUT1: J4.47 R5.2 | length 3024.7
  Top Layer w8: R5.2 v1(-1585,551.18) ; J4.47 v1(451.77,-1260)
  Signal 1 w9: v1(-1585,551.18) -1248.15,551.18 451.77,-1148.74 v1(451.77,-1260)
Q1-OUT2: J4.46 R4.2 | length 3072.2
  Top Layer w8: R4.2 v1(-1585,590.55) ; J4.46 v1(471.46,-1285)
  Signal 1 w9: v1(-1585,590.55) -1248.15,590.55 471.46,-1129.06 v1(471.46,-1285)
Q1-OUT3: J4.49 R7.2 | length 2929.6
  Top Layer w8: R7.2 v1(-1585,472.44) ; J4.49 v1(412.4,-1260)
  Signal 1 w9: v1(-1585,472.44) -1248.15,472.44 412.4,-1188.11 v1(412.4,-1260)
Q1-OUT4: J4.48 R6.2 | length 2977.1
  Top Layer w8: R6.2 v1(-1585,511.81) ; J4.48 v1(432.09,-1285)
  Signal 1 w9: v1(-1585,511.81) -1248.15,511.81 432.09,-1168.43 v1(432.09,-1285)
Q1-TEMP1: J2.9 J4.37 | length 2540.4
  Top Layer w8: J4.37 v1(648.62,-1260)
  Signal 1 w9: v1(648.62,-1260) 648.62,-465.2 1665,551.18 1850,551.18 J2.9
Q1-TEMP2: J2.10 J4.36 | length 2397.8
  Top Layer w8: J4.36 v1(668.31,-1285)
  Signal 1 w9: v1(668.31,-1285) 668.31,-484.88 1665,511.81 J2.10
Q2-DIR12: J1.20 J3.16 | length 2177
  Top Layer w8: J3.16 v1(-687.99,-1285)
  Signal 1 w9: J1.20 -1850,78.74 -1450.95,78.74 -687.99,-684.21 v1(-687.99,-1285)
Q2-DIR34: J1.13 J3.9 | length 2394.1
  Top Layer w8: J3.9 v1(-550.2,-1260)
  Signal 1 w9: J1.13 -1756.3,300 -1431.61,300 -550.2,-581.42 v1(-550.2,-1260)
Q2-ENC-A1: J2.28 J4.17 | length 1528.3
  Top Layer w8: J4.17 v1(1042.32,-1285)
  Signal 1 w9: v1(1042.32,-1285) 1042.32,-829.53 1675,-196.85 J2.28
Q2-ENC-A2: J2.31 J4.15 | length 1483.1
  Top Layer w8: J4.15 v1(1081.69,-1285)
  Signal 1 w9: v1(1081.69,-1285) 1081.69,-918.27 1685,-314.96 1850,-314.96 J2.31
Q2-ENC-A3: J2.33 J4.13 | length 1388.1
  Top Layer w8: J4.13 v1(1121.06,-1285)
  Signal 1 w9: v1(1121.06,-1285) 1121.06,-957.64 1685,-393.7 1850,-393.7 J2.33
Q2-ENC-A4: J2.35 J4.10 | length 1284.9
  Top Layer w8: J4.10 v1(1180.12,-1260)
  Signal 1 w9: v1(1180.12,-1260) 1180.12,-977.32 1685,-472.44 1850,-472.44 J2.35
Q2-ENC-B1: J2.37 J4.8 | length 1189.8
  Top Layer w8: J4.8 v1(1219.49,-1260)
  Signal 1 w9: v1(1219.49,-1260) 1219.49,-1016.69 1685,-551.18 1850,-551.18 J2.37
Q2-ENC-B2: J2.39 J4.6 | length 1094.8
  Top Layer w8: J4.6 v1(1258.86,-1260)
  Signal 1 w9: v1(1258.86,-1260) 1258.86,-1056.06 1685,-629.92 1850,-629.92 J2.39
Q2-ENC-B3: J2.41 J4.4 | length 999.7
  Top Layer w8: J4.4 v1(1298.23,-1260)
  Signal 1 w9: v1(1298.23,-1260) 1298.23,-1095.43 1685,-708.66 1850,-708.66 J2.41
Q2-ENC-B4: J2.42 J4.3 | length 857.2
  Top Layer w8: J4.3 v1(1317.91,-1285)
  Signal 1 w9: v1(1317.91,-1285) 1317.91,-1115.12 1685,-748.03 J2.42
Q2-LIM-P3: J2.26 J4.19 | length 1623.4
  Top Layer w8: J4.19 v1(1002.95,-1285)
  Signal 1 w9: v1(1002.95,-1285) 1002.95,-790.16 1675,-118.11 J2.26
Q2-LIM-P4: J2.24 J4.22 | length 1726.6
  Top Layer w8: J4.22 v1(943.9,-1260)
  Signal 1 w9: v1(943.9,-1260) 943.9,-770.47 1675,-39.37 J2.24
Q2-MISO-C1: J2.19 J4.27 | length 2059.3
  Top Layer w8: J4.27 v1(845.47,-1285)
  Signal 1 w9: v1(845.47,-1285) 845.47,-672.05 1675,157.48 1850,157.48 J2.19
Q2-MISO-C2: J2.20 J4.26 | length 1916.7
  Top Layer w8: J4.26 v1(865.16,-1260)
  Signal 1 w9: v1(865.16,-1260) 865.16,-691.73 1675,118.11 J2.20
Q2-MISO-C3: J2.21 J4.25 | length 1964.2
  Top Layer w8: J4.25 v1(884.84,-1285)
  Signal 1 w9: v1(884.84,-1285) 884.84,-711.42 1675,78.74 1850,78.74 J2.21
Q2-MISO-C4: J2.18 J4.28 | length 2011.7
  Top Layer w8: J4.28 v1(825.79,-1260)
  Signal 1 w9: v1(825.79,-1260) 825.79,-652.36 1675,196.85 J2.18
Q2-MISO-P1: J2.12 J4.34 | length 2302.7
  Top Layer w8: J4.34 v1(707.68,-1285)
  Signal 1 w9: v1(707.68,-1285) 707.68,-524.25 1665,433.07 J2.12
Q2-MISO-P2: J2.11 J4.35 | length 2445.3
  Top Layer w8: J4.35 v1(687.99,-1260)
  Signal 1 w9: v1(687.99,-1260) 687.99,-504.57 1665,472.44 1850,472.44 J2.11
Q2-MISO-P3: J2.14 J4.32 | length 2207.7
  Top Layer w8: J4.32 v1(747.05,-1285)
  Signal 1 w9: v1(747.05,-1285) 747.05,-563.62 1665,354.33 J2.14
Q2-MISO-P4: J2.13 J4.33 | length 2350.3
  Top Layer w8: J4.33 v1(727.36,-1260)
  Signal 1 w9: v1(727.36,-1260) 727.36,-543.94 1665,393.7 1850,393.7 J2.13
Q2-MOSI: J3.11 R10.2 | length 2160.1
  Top Layer w8: R10.2 v1(-1665,236.22) ; J3.11 v1(-589.57,-1260)
  Signal 1 w9: v1(-1665,236.22) -1450,236.22 -589.57,-624.21 v1(-589.57,-1260)
Q2-OUT1: J4.43 R23.1 | length 2570.5
  Top Layer w8: J4.43 v1(530.51,-1260) ; v1(1665,748.03) R23.1
  Signal 1 w9: v1(530.51,-1260) 530.51,-386.46 v1(1665,748.03)
Q2-OUT2: J4.45 R22.1 | length 2665.5
  Top Layer w8: J4.45 v1(491.14,-1260) ; v1(1665,826.77) R22.1
  Signal 1 w9: v1(491.14,-1260) 491.14,-347.09 v1(1665,826.77)
Q2-OUT3: J4.2 R25.1 | length 660.8
  Top Layer w8: J4.2 v1(1337.6,-1260) ; v1(1665.94,-826.77) R25.1
  Signal 1 w9: v1(1337.6,-1260) 1337.6,-1155.12 v1(1665.94,-826.77)
Q2-OUT4: J4.41 R24.1 | length 2475.4
  Top Layer w8: J4.41 v1(569.88,-1260) ; v1(1665,669.29) R24.1
  Signal 1 w9: v1(569.88,-1260) 569.88,-425.83 v1(1665,669.29)
Q2-TEMP1: J2.23 J4.23 | length 1869.2
  Top Layer w8: J4.23 v1(924.21,-1285)
  Signal 1 w9: v1(924.21,-1285) 924.21,-750.79 1675,0 1850,0 J2.23
Q2-TEMP2: J2.22 J4.24 | length 1821.6
  Top Layer w8: J4.24 v1(904.53,-1260)
  Signal 1 w9: v1(904.53,-1260) 904.53,-731.1 1675,39.37 J2.22
RELAY: R31.1 U1.6 | length 138.1
  Top Layer w15: R31.1 -65,475 -33.4,443.4 U1.6
RELAY-ON: J1.1 J3.2 R26.1 | length 3459.5
  Top Layer w11: J1.1 -970.52,826.77 -130,-13.75 R26.1 -130,-995 -412.4,-1277.4 J3.2
SCLK: J3.21 R17.2 | length 1723.7
  Top Layer w8: R17.2 v1(-1665,-118.11) ; J3.21 v1(-786.42,-1260)
  Signal 1 w9: v1(-1665,-118.11) -1450.94,-118.11 -786.42,-782.64 v1(-786.42,-1260)
SCLK1: J3.4 R2.2 | length 2691.4
  Top Layer w8: J3.4 v1(-451.77,-1285)
  Top Layer w9: R2.2 v1(-1625,669.29)
  Signal 1 w9: v1(-1625,669.29) -1625,445 -1605,425 -1359.76,425 -451.77,-482.99 v1(-451.77,-1285)
SCLK-CUR: J3.19 R15.2 | length 1818.8
  Top Layer w8: R15.2 v1(-1665,-39.37) ; J3.19 v1(-747.05,-1260)
  Signal 1 w9: v1(-1665,-39.37) -1450.94,-39.37 -747.05,-743.27 v1(-747.05,-1260)
SCLK-POT: J3.18 R14.2 | length 1866.3
  Top Layer w8: R14.2 v1(-1665,0) ; J3.18 v1(-727.36,-1285)
  Signal 1 w9: v1(-1665,0) -1450.94,0 -727.36,-723.58 v1(-727.36,-1285)
pads on no net: D1.3 FD1.0 FD2.0 FD3.0 J3.51 J3.52 J4.51 J4.52 Q1.3 U1.2 U1.7

## Polygon pours and split planes (outlines as drawn)
GND on Bottom Layer "GND-POUR" (hatched Vertical grid 9.5 track 10, remove dead copper, pour order 0): -2270,-1355 ccw(c-2125,-1355) -2125,-1500 2125,-1500 ccw(c2127.5,-1357.5) 2270,-1355 2270,1025 ccw(c2125,1025) 2125,1170 -2125,1170 ccw(c-2125,1025) -2270,1025
GND on Signal 1 "GND-POUR" (hatched Vertical grid 9.5 track 10, remove dead copper, pour order 1): -2270,-1355 ccw(c-2125,-1355) -2125,-1500 2125,-1500 ccw(c2127.5,-1357.5) 2270,-1355 2270,1025 ccw(c2125,1025) 2125,1170 -2125,1170 ccw(c-2125,1025) -2270,1025
GND on Plane 1 (split plane): 171 vertices, not listed, extent -2279.97,-1529.97 2279.97,1179.97

## Other copper
Top Layer:
  rectangle net 5V-OUT: -1340,-1410 -1219.49,-1359.5
  rectangle net 5V-OUT: -1346.6,-1270 -1210.49,-1041.65
  rectangle net 3.3V-OUT: -1189.12,-1270 -1053.01,-974.52
  rectangle net 5V-OUT: -1341.1,-1275 -1215.99,-1238.5
  rectangle net 5V-OUT: -1258.86,-1290 -1220,-1270
  rectangle net 5V-OUT: -1337.6,-1286.78 -1298.23,-1270
  rectangle net 3.3V-OUT: -1180.12,-1286.78 -1140.75,-1270
  rectangle net 3.3V-OUT: -1101.38,-1290 -1062.52,-1270
  rectangle net 3.3V-OUT: -1183.62,-1275 -1058.51,-1238.5
Signal 1:
  rectangle net 3.3V-OUT: -1189.12,-1270 -1053.01,-978.38
  rectangle net 5V-OUT: -1346.6,-1270 -1210.49,-1041.65
  rectangle net 5V-OUT: -1337.6,-1298.22 -1298.23,-1260
  region net 5V-OUT: -1219.49,-1260 -1258.86,-1260 -1258.86,-1298.22 -1219.49,-1298.22
  region net 3.3V-OUT: -1062.01,-1260 -1101.38,-1260 -1101.38,-1298.22 -1062.01,-1298.22
  rectangle net 3.3V-OUT: -1180.12,-1298.22 -1140.75,-1260
  pour cut-out: -1745,-630 -1825,-630 -1825,-540 -1745,-540
  pour cut-out: -1375,-1315 -1030,-1315 -1030,-1270 -1375,-1270
Plane 1 (plane layer: these items are gaps in the copper):
  rectangle: -1098.78,-1280 -1063.78,-1260
  rectangle: -1177.52,-1280 -1142.52,-1260
  rectangle: -1256.26,-1280 -1221.26,-1260
  rectangle: -1335,-1280 -1300,-1260

## Silkscreen, mask and mechanical layers (free items; w line width, h text height)
Top Overlay:
  circle w7: c-1200,942.52 r71
  circle w7: c600,942.52 r71
  lines w6: -2000,-65 -2000,-1375 ccw(c-1825,-1375) -1925.38,-1518.35 ; -2000,65 -2000,1025 cw(c-1825,1025) -1825,1200 ; -1665,-511.81 -1545,-511.81 ; -1665,-393.7 -1545,-393.7 ; -1665,-275 -1535,-275 ; -1665,-195 -1535,-195 ; -1665,-118.1 -1636.97,-118.1 -1625.08,-130 ; -1665,-75 -1535,-75 ; -1665,-39.36 -1636.97,-39.36 -1617.61,-20 -1535,-20 ; -1665,0.01 -1636.97,0.01 -1601.98,35 -1535,35 ; -1665,39.38 -1636.97,39.38 -1586.35,90 -1535,90 ; -1665,118.11 -1636.97,118.11 -1610.08,145 -1535,145 ; -1665,157.48 -1636.97,157.48 -1594.45,200 -1535,200 ; -1665,236.22 -1636.97,236.22 -1618.19,255 -1535,255 ; -1665,275.6 -1636.97,275.6 -1602.57,310 -1535,310 ; -1665,393.7 -1636.97,393.7 -1623.27,380 -1535,380 ; -1665,472.44 -1636.97,472.44 -1599.53,435 -1535,435 ; -1665,511.81 -1636.97,511.81 -1615.16,490 -1535,490 ; -1665,551.18 -1636.97,551.18 -1630.79,545 -1535,545 ; -1665,590.55 -1636.97,590.55 -1627.52,600 ; -1665,629.92 -1636.97,629.92 ; -1665,669.29 -1636.97,669.29 ; -1665,708.66 -1636.97,708.66 ; -1631.89,635 -1636.97,629.92 ; -1626.42,600 -1535,600 ; -1616.26,690 -1636.97,669.29 ; -1600.63,745 -1636.97,708.66 ; -1535,655 -1611.89,655 -1636.97,629.92 ; -1535,710 -1596.26,710 -1636.97,669.29 ; -1535,765 -1580.63,765 -1636.97,708.66 ; 1825,1200 cw(c1825,1025) 2000,1025 2000,-1375 cw(c1825,-1375) 1925.38,-1518.35 ; -1625.08,-130 -1535,-130 -1625.08,-130
  text "Safety Chain" at -1124.88,1051.72 h100
  text "Safety Chain" at 775.12,1051.72 h100
  text "J5" at -937.42,820.57 h100
  text "J6" at 961.77,810.02 h100
  text "12V" at 2136.95,25 h70
  text "GND" at 2127.53,-264.13 h70
  text "DQLA-F" at -169.64,-318.5 h125
  text "(" at -677.04,-452.37 h140
  text "(" at 677.04,-452.37 h140
  text "DQLA FPGA Interface Board" at -629.38,-454.65 h125
  text "Rev 1.1 (January 2023)" at -338.98,-568.48 h80
  text "12V" at 2136.95,-575 h70
  text "©" at -489.67,-691.26 h100
  text "2023 Johns Hopkins University" at -404.24,-693.48 h80
  text "GND" at 2127.53,-864.13 h70
  text "PS Relay" at -2269.79,-868.34 h70
Bottom Overlay:
  text "1" at -1712.33,790.58 h120
  text "1" at 1987.67,790.58 h120
  text "5" at -1729.74,645.72 h80
  text "5" at 1970.26,645.72 h80
  text "10" at -1935,487.74 h80
  text "10" at 1765,487.74 h80
  text "15" at -1690.04,251.97 h80
  text "15" at 2009.96,251.97 h80
  text "20" at -1935,94.04 h80
  text "20" at 1765,94.04 h80
  text "25" at -1688.6,-142.14 h80
  text "25" at 2011.4,-142.14 h80
  text "30" at -1935,-299.66 h80
  text "30" at 1765,-299.66 h80
  text "35" at -1687.04,-535.88 h80
  text "35" at 2012.96,-535.88 h80
  text "GND" at -1993.92,-574.03 h80
  text "EN" at -2058.05,-674.07 h80
  text "40" at -1935,-693.36 h80
  text "40" at 1765,-693.36 h80
  text "GND" at -1983.92,-774.03 h80
Mechanical 1:
  the board outline again, w5

## Text inside footprints (layer, text, board x,y; h text height)
J3: Top Overlay "50" at -1447.5,-1332.5 h75; Top Overlay "1" at -377.5,-1330 h75
J4: Top Overlay "50" at 302.5,-1332.5 h75; Top Overlay "1" at 1372.5,-1330 h75